# Altium PCB Course Design.PcbDoc
Units mil, origin at the board's own origin, x right, y up, seen from the top; angles counter-clockwise.
Board outline 2739.95 x 2450 mil, 2 copper layers (Top Layer, Bottom Layer); 29 components, 50 nets, 171 pads, 9 vias.
Unrouted connection lines stored in the file: 4.
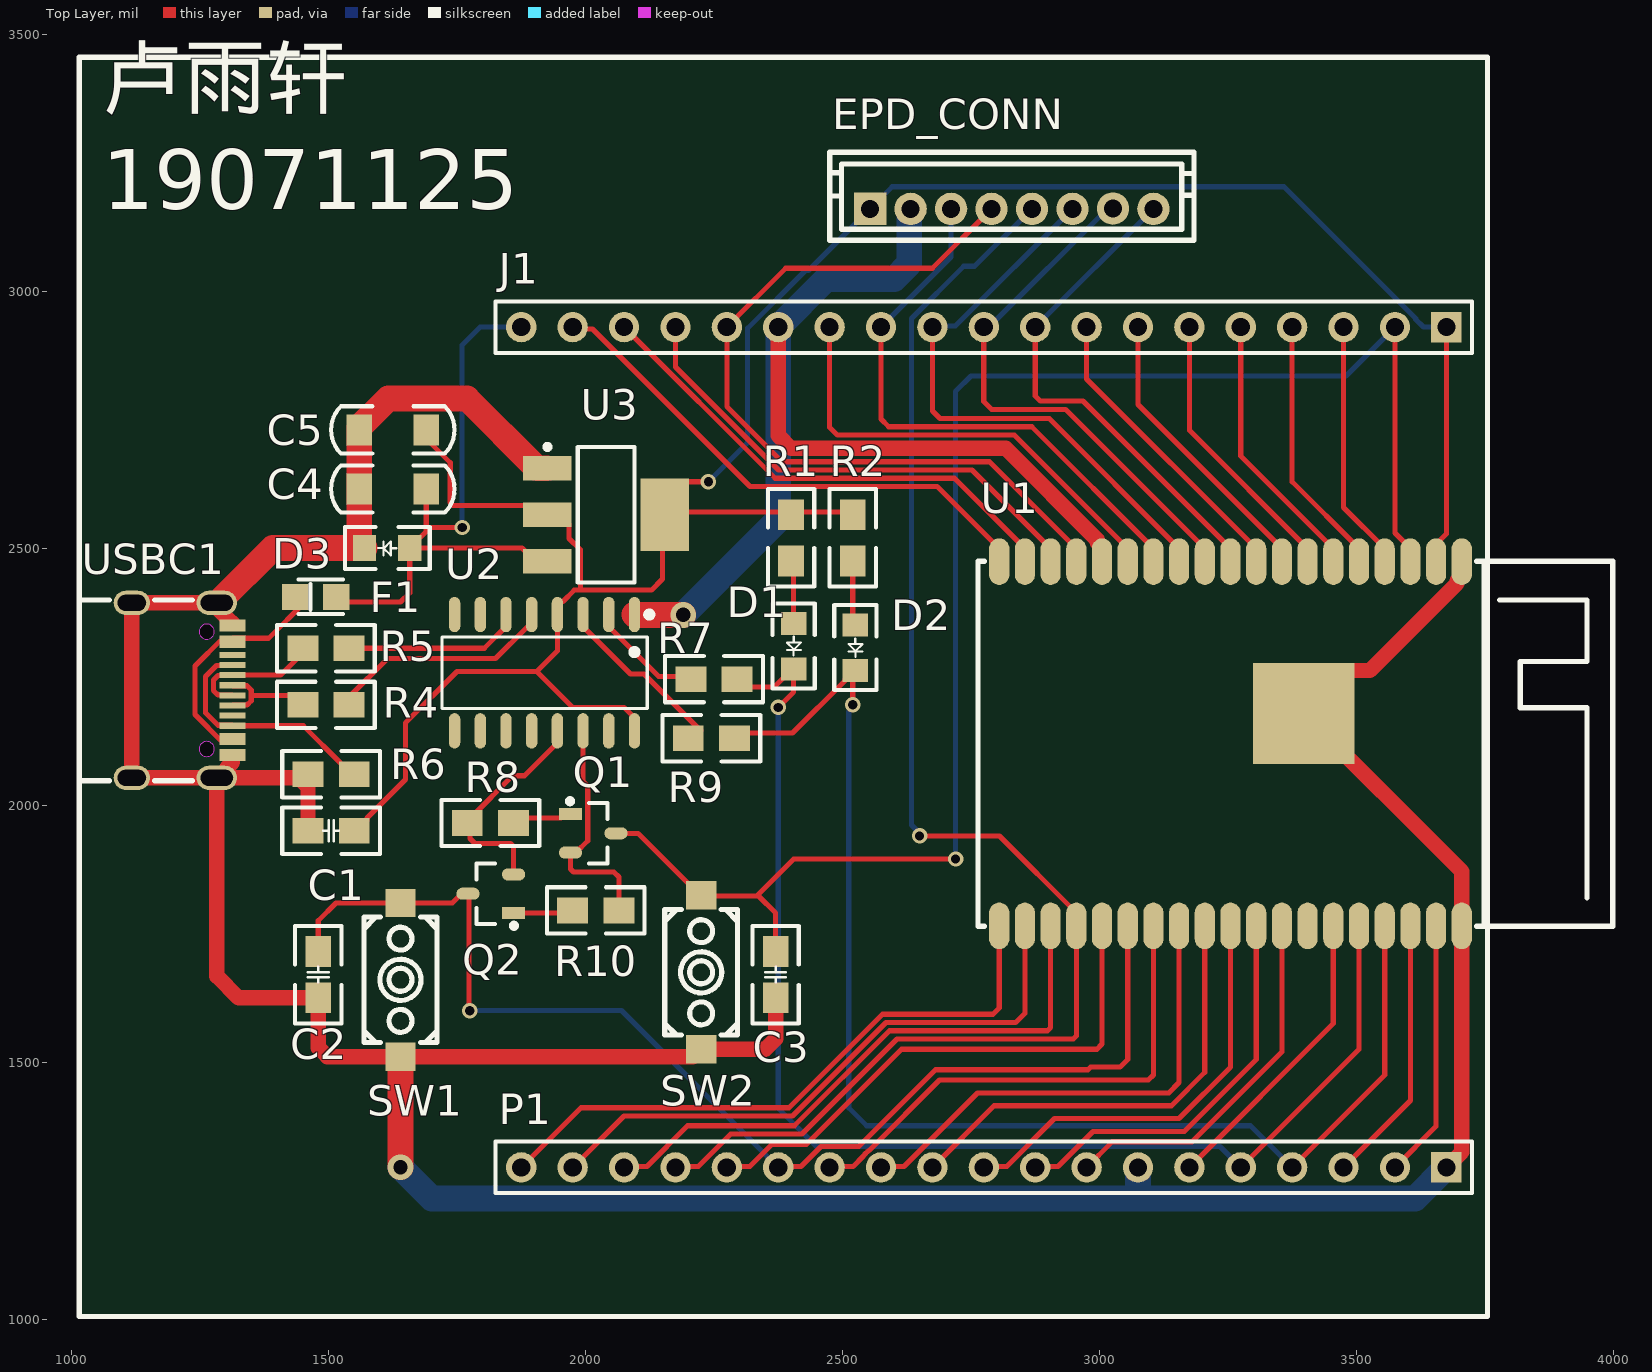
[diagram p0: Top Layer view]
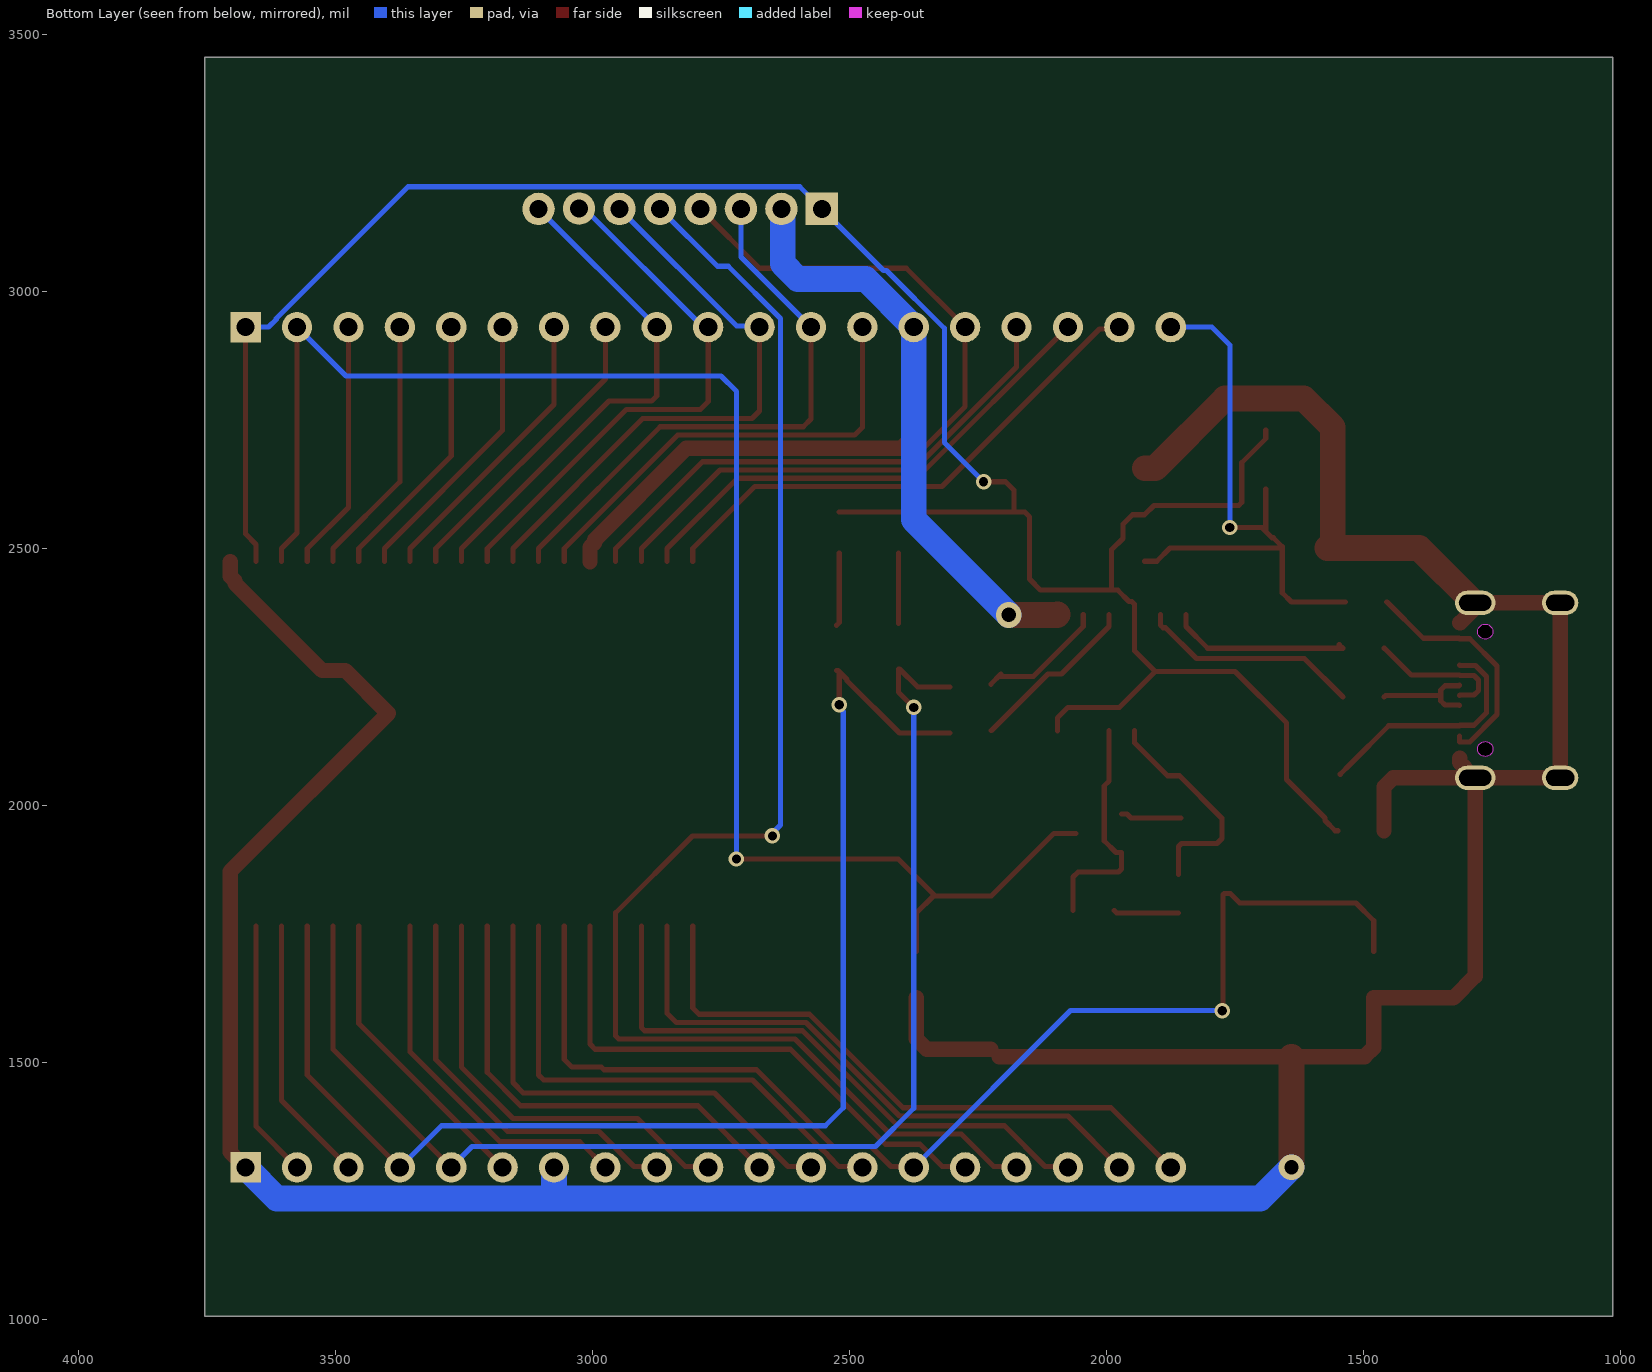
[diagram p1: Bottom Layer view, seen from below]

## Layer stack, top to bottom
Top Solder: solder mask 0.4, Solder Resist, Dk 3.5
Top Layer: signal copper 1.4
Dielectric 1: dielectric 12.6, FR-4, Dk 4.8
Bottom Layer: signal copper 1.4
Bottom Solder: solder mask 0.4, Solder Resist, Dk 3.5

## Board outline
1015.05,1005 1015.05,3455 3755,3455 3755,1005

## Design rules (kind name [scope] priority, off if disabled: settings)
AcuteAngle [All] p1: minimum=9.00000000000000E+0001 checktracksonly=TRUE
Clearance [All] p1: gap=6 ignorepadtopadclearanceinfootprint=FALSE
MinimumSolderMaskSliver [All] p1: minsoldermaskwidth=1
PolygonConnect [All] p1: connectstyle=Relief reliefconductorwidth=10 reliefentries=4 polygonreliefangle="90 Angle" airgapwidth=10
RoutingVias [All] p1: holewidth=28 width=50 viastyle="Through Hole" minholewidth=18 minwidth=30 maxholewidth=28 maxwidth=50
SilkToSolderMaskClearance [IsPad] p1: minsilkscreentomaskgap=6 clearancetoexposedcopper=TRUE
SolderMaskExpansion [All] p1: expansion=4 istentingtop=FALSE
UnRoutedNet [All] p1: checkbadconnections=TRUE
Width [All] p1: maxlimit=100 minlimit=6 preferedwidth=10
27 further rules are at their usual default settings.

## Components (designator, comment, footprint, x,y, rotation, side; value= is the part's Value field where it differs from the comment)
C1 "Cap" 0805C 1550,1950 r180 top value=0.1uF
C2 "Cap" 0805C 1480,1625 r90 top value=0.1uF
C3 "Cap" 0805C 2370,1625 r90 top value=0.1uF
C4 "Cap" 1206C 1560,2615 r0 top value=22uF
C5 "Cap" 1206C 1560,2730 r0 top value=22uF
D1 "RX RED" 0805D 2405,2353 r270 top
D2 "TX GREEN" 0805D 2525,2350 r270 top
D3 "RED LED" 0805D 1658,2500 r180 top
EPD_CONN "X2012WV-08-N0SN" CONN-TH_X2012WV-08-N0SN 2824.1,3160.2 r180 top
F1 "MF PSMF050" 0805 1475,2405 r0 top
J1 "Header 19" HDR1X19 3675,2930 r180 top
P1 "Header 19" HDR1X19 3675,1295 r180 top
Q1 "S8050" SOT23_N 2015,1945 r180 top
Q2 "S8050" SOT23_N 1815.71,1827.6 r0 top
R1 "Res2" 0805R 2400,2475 r90 top value=1K
R2 "Res2" 0805R 2520,2475 r90 top value=1K
R4 "Res2" 0805R 1450,2195 r0 top value=22R
R5 "Res2" 0805R 1450,2305 r0 top value=22R
R6 "Res2" 0805R 1550,2060 r180 top value=5K
R7 "Res2" 0805R 2205,2245 r0 top value=100R
R8 "Res2" 0805R 1770,1965 r0 top value=10K
R9 "Res2" 0805R 2200,2130 r0 top value=100R
R10 "Res2" 0805R 2065,1795 r180 top value=10K
SW1 "K2-1107ST-A4DW-06_C118141" KEY-SMD_L6.2-W3.6-LS8.0 1640,1660 r90 top
SW2 "K2-1107ST-A4DW-06_C118141" KEY-SMD_L6.2-W3.6-LS8.0 2225,1674.6 r90 top
U1 "ESP32-WROVER-B" "ESP32 WROVER B" 3390,2150 r270 top
U2 "CH340C" SOP-16_L10.0 1930,2245 r180 top
U3 "AMS1117-3.3_C2992570" SOT223_N 2040,2565 r0 top
USBC1 "TYPE-C-31-M-12" USB-C_SMD 1165,2230 r270 top

## Footprints (in the part's own frame and the unit in brackets; to place one, negate y for a bottom-side part, rotate by r counter-clockwise, add the part's x,y. Pads: shape width x height; smd on the part's side, far side on the other; paste and mask are expansions set on the pad)
0805 [mil] "Capacitor, SM Tantalum; Body 2.0 x 1.25 mm (LxW typ)"
  rect 52x50 smd: 1(-40,0) 2(40,0)
  silkscreen extent -33,-33 53,33
0805C [mil]
  rect 60x50 smd: 1(0,0) 2(90,0)
  silkscreen extent -50,-45 140,45
0805D [mil]
  rect 45x50 smd: 1(0,0) 2(88,0)
  silkscreen extent -39,-41 126,41
0805R [mil]
  rect 60x50 smd: 1(0,0) 2(90,0)
  silkscreen extent -50,-45 140,45
1206C [mil]
  rect 50x60 smd: 1(0,0) 2(130,0)
  silkscreen extent -55,-46 185,46
CONN-TH_X2012WV-08-N0SN [mil]
  rect 63x63 hole 35.4 mask+1.97: 1(270.3,0.2)
  round 63 hole 35.4 mask+1.97: 2(191.5,0.2) 3(112.8,0.2) 4(34.1,0.2) 5(-44.7,0.2) 6(-123.4,0.2) 7(-202.2,-0.4) 8(-280.9,0.2)
  silkscreen extent -360,-110 349,61
"ESP32 WROVER B" [mil]
  oval 90.6x39.4 smd mask+2: 1(-323.6,315) 2(-323.6,265) 3(-323.6,215) 4(-323.6,165) 5(-323.6,115) 6(-323.6,65) 7(-323.6,15) 8(-323.6,-35) 9(-323.6,-85) 10(-323.6,-135) 11(-323.6,-185) 12(-323.6,-235) 13(-323.6,-285) 14(-323.6,-335) 15(-323.6,-385) 16(-323.6,-435) 17(-323.6,-485) 18(-323.6,-535) 19(-323.6,-585) 20(385,-585) 21(385,-535) 22(385,-485) 23(385,-435) 24(385,-385) 25(385,-335) 26(385,-285) 27(385,-235) 28(385,-185) 29(385,-135) 30(385,-85) 31(385,-35) 32(385,15) 33(385,65) 34(385,115) 35(385,165) 36(385,215) 37(385,265) 38(385,315)
  rect 196.9x196.9 smd mask+2: 39(-28.3,7.5)
  silkscreen extent -324,-626 386,609
HDR1X19 [mm] "Connector; Header; 19 Position"
  rect 1.5x1.5 hole 0.9: 1(0,0)
  round 1.5 hole 0.9: 2(2.54,0) 3(5.08,0) 4(7.62,0) 5(10.16,0) 6(12.7,0) 7(15.24,0) 8(17.78,0) 9(20.32,0) 10(22.86,0) 11(25.4,0) 12(27.94,0) 13(30.48,0) 14(33.02,0) 15(35.56,0) 16(38.1,0) 17(40.64,0) 18(43.18,0) 19(45.72,0)
  silkscreen extent -1.27,-1.27 46.99,1.27
KEY-SMD_L6.2-W3.6-LS8.0 [mm]
  rect 1.4x1.5 smd mask+0.051: 1(-3.8,0) 2(3.8,0)
  silkscreen extent -3.1,-1.8 3.1,1.8
SOP-16_L10.0 [mm]
  oval 0.56x1.745 smd mask+0.051: 1(-4.198,-3.192) 2(-2.928,-3.192) 3(-1.658,-3.192) 4(-0.388,-3.192) 5(0.882,-3.192) 6(2.152,-3.192) 7(3.422,-3.192) 8(4.692,-3.192) 9(4.692,2.553) 10(3.422,2.553) 11(2.152,2.553) 12(0.882,2.553) 13(-0.388,2.553) 14(-1.658,2.553) 15(-2.928,2.553) 16(-4.198,2.553)
  silkscreen extent -5.08,-3.34 5.32,1.45
SOT23_N [mm] "SOT23, 3-Leads, Body 2.9x1.3mm, Pitch 0.95mm, Lead Span 2.3mm - Reverse Pinning, IPC Medium Density"
  rect 1.15x0.6 smd: 1(1.125,-0.95)
  oval 1.15x0.6 smd: 2(1.125,0.95) 3(-1.125,0)
  silkscreen extent -0.7,-1.71 1.27,1.5, body extent -0.7,-1.5 0.7,1.5, height 1.1
SOT223_N [mm] "SOT223, 4-Leads, Body 6.5x3.5mm, Pitch 2.3mm, Lead Span 7mm, IPC Medium Density"
  rect 2.4x1.2 smd: 1(-2.9,2.3) 2(-2.9,0) 3(-2.9,-2.3)
  rect 2.4x3.6 smd: 4(2.9,0)
  silkscreen extent -3.02,-3.35 1.4,3.47, body extent -1.85,-3.35 1.85,3.35, height 1.7
USB-C_SMD [mm]
  oval 1.2x2 hole 0.8 slot 1.6 at 90 deg mask+0.051: 0(-4.153,2.99) 0(4.497,2.99)
  oval 1.2x1.8 hole 0.8 slot 1.4 at 90 deg mask+0.051: 0(-4.153,-1.21) 0(4.497,-1.21)
  rect 0.3x1.3 smd mask+0.051: A1(-3.178,3.758) A4(-2.378,3.758) A5(-1.078,3.758) A6(-0.078,3.758) A7(0.422,3.758) A8(1.422,3.758) A9(2.722,3.758) A12(3.522,3.758) B1(3.222,3.758) B4(2.422,3.758) B5(1.922,3.758) B6(0.922,3.758) B7(-0.578,3.758) B8(-1.578,3.758) B9(-2.078,3.758) B12(-2.878,3.758)
  Keep-Out Layer board cut-out: 3.447,2.49 3.41,2.652 3.306,2.783 3.155,2.855 2.989,2.855 2.838,2.783 2.734,2.652 2.697,2.49 2.697,2.49 2.734,2.327 2.838,2.197 2.989,2.124 3.155,2.124 3.306,2.197 3.41,2.327 3.447,2.49
  Keep-Out Layer board cut-out: -2.353,2.49 -2.39,2.652 -2.494,2.783 -2.644,2.855 -2.811,2.855 -2.962,2.783 -3.066,2.652 -3.103,2.49 -3.103,2.49 -3.066,2.327 -2.962,2.197 -2.811,2.124 -2.644,2.124 -2.494,2.197 -2.39,2.327 -2.353,2.49
  silkscreen extent -4.3,-3.81 4.64,1.77

## Part data
C1 C2 C3 C4 C5: "Capacitor", LatestRevisionDate=17-Jul-2002, LatestRevisionNote="Re-released for DXP Platform.", PackageDescription="Radial Cap, Thru-Hole; 2 Leads; 0.3 in Pin Spacing", PackageReference=RAD-0.3, Published=8-Jun-2000, Publisher="Altium Limited"
D1 D2 D3: library part LED0, "Typical INFRARED GaAs LED", LatestRevisionDate=08-Jul-2005, LatestRevisionNote="Mech Layer 1 removed.", PackageDescription="LED; 2 Leads", PackageReference=LED-0, Published=8-Jun-2000, Publisher="Altium Limited"
EPD_CONN: JLCPCB Part Class="Extended Part", LCSC Part Name="2mm 1x8P", Manufacturer="XKB Connectivity(中国星坤)", Operating Temperature Range=-25℃~+85℃, Welding Temperature (Max)=260℃, Add into BOM=yes, Contact Material=黄铜, Contact Plating=锡, Convert to PCB=yes, Datasheet=https://atta.szlcsc.com/upload/public/pdf/source/20211011/616CF97ACD7EE1DA4493F5FBA6803F08.pdf, Device=X2012WV-08-N0SN, Gender=母型插口, Manufacturer Part=X2012WV-08-N0SN, Mounting Style=-, Name=X2012WV-08-N0SN, Number of PINs Per Row=8, Number of Rows=1, Pins Structure=1x8P, Pitch=2mm, Reference Series=-, Row Spacing=-, Supplier=LCSC, Supplier Footprint=插件,P=2mm, Supplier Part=C571294, Symbol=X2012WV-08-N0SN
F1: library part "Fuse 2", "Fuse", LatestRevisionDate=17-Jul-2002, LatestRevisionNote="Re-released for DXP Platform.", PackageDescription="Thru-Hole; 2 Leads", PackageReference=PIN-W2/E2.8, Published=8-Jun-2000, Publisher="Altium Limited"
J1 P1: "Header, 19-Pin", LatestRevisionDate=17-Jul-2002, LatestRevisionNote="Re-released for DXP Platform.", Publisher="Altium Limited"
Q1 Q2: JLCPCB Part Class="Extended Part", Manufacturer=Doeshare(德芯), Add into BOM=yes, Convert to PCB=yes, Datasheet=https://atta.szlcsc.com/upload/public/pdf/source/20220117/E6D3315E0D6ADDB25840BFFAC039C5C0.pdf, Device=S8050, LCSC Part Name=S8050, Manufacturer Part=S8050, Name=S8050, Supplier=LCSC, Supplier Footprint=SOT-23, Supplier Part=C2931719, Symbol=S8050_C2931719
R1 R2 R4 R5 R6 R7 R8 R9 R10: "Resistor", LatestRevisionDate=17-Jul-2002, LatestRevisionNote="Re-released for DXP Platform.", PackageDescription="Axial Device, Thru-Hole; 2 Leads; 0.4 in Pin Spacing", PackageReference=AXIAL-0.4, Published=8-Jun-2000, Publisher="Altium Limited"
SW1 SW2: Contact Current=50mA, Insulation Resistance=100MΩ, JLCPCB Part Class="Extended Part", LCSC Part Name="轻触开关 3.6*6.1*2.5", Manufacturer=韩国韩荣, Manufacturer Part=K2-1107ST-A4DW-06, Operating Force=250gf@±30gf, Operating Temperature=-25℃~+85℃, Voltage Rating (DC)=12V, Actuator Style=矩形按钮, Add into BOM=yes, Circuit=单刀单掷, Convert to PCB=yes, Datasheet=https://atta.szlcsc.com/upload/public/pdf/source/20210810/381712CEF248770C072B585C3485C888.pdf, Device=K2-1107ST-A4DW-06_C118141, Mechanical Life=100000, Mounting Style=立贴, Name=K2-1107ST-A4DW-06, Supplier=LCSC, Supplier Footprint=SMD, Supplier Part=C118141, Switch Height=2.5mm, Switch Length=6.1mm, Switch Width=3.6mm, Symbol=K2-1107ST-A4SW-06, With Lamp=-
U1: BOM_JLCPCB Part Class="Extended Part", BOM_Manufacturer="Espressif Systems", BOM_Manufacturer Part=ESP32-WROVER-B, BOM_Supplier=LCSC, BOM_Supplier Part=C503591, Contributor=LCSC, spicePre=U, spiceSymbolName=ESP32-WROVER-B
U2: BOM_JLCPCB Part Class="Extended Part", BOM_Manufacturer=WCH, BOM_Manufacturer Part=CH340C, BOM_Supplier=LCSC, BOM_Supplier Part=C84681, spicePre=U, spiceSymbolName=CH340C
U3: JLCPCB Part Class="Extended Part", LCSC Part Name=AMS1117-3.3, Manufacturer=国芯佳品, Add into BOM=yes, Convert to PCB=yes, Datasheet=https://atta.szlcsc.com/upload/public/pdf/source/20220729/0D21C21EC310E4778671BF6BAE438640.pdf, Device=AMS1117-3.3_C2992570, Manufacturer Part=AMS1117-3.3, Name=AMS1117-3.3, Supplier=LCSC, Supplier Footprint=SOT-223, Supplier Part=C2992570, Symbol=AMS1117-3.3_C2992570
USBC1: Current Rating - Power (Max)=250mA, JLCPCB Part Class="Extended Part", Manufacturer=韩国韩荣, Add into BOM=yes, Connector Type=Type-C, Convert to PCB=yes, Datasheet=https://atta.szlcsc.com/upload/public/pdf/source/20210111/C2682493_D8CCFED08835E878D16ACCF4460E43B8.pdf, Device=TYPE-C-31-M-12, Gender=母座, LCSC Part Name=TYPE-C-31-M-12, Manufacturer Part=TYPE-C-31-M-12, Name=TYPE-C-31-M-12, Number of Contacts=16, Number of Ports=1, Standard=-, Supplier=LCSC, Supplier Footprint=-, Supplier Part=C165948, Symbol=TYPE-C-31-M-12

## Via types
v1: diameter 30, hole 18, Top Layer to Bottom Layer, 7 vias
v2: diameter 50, hole 28, Top Layer to Bottom Layer, 2 vias

## Nets (pads, with @x,y where several pads share a name; then routed paths per layer and width w, separated by ;. In a path a pad name is that pad's centre, name@x,y a point inside that pad or via, vN(x,y) a via of type N, cw(c..) or ccw(c..) an arc to the next point about the centre after c; other vN are vias at no path point)
+3.3: C1.1 C5.2 EPD_CONN.1 J1.1 R1.2 R2.2 U1.2 U2.4 U2.16 U3.2 U3.4 | length 4708.8
  Top Layer w10: C1.1 1555,1950 1575,1970 1575,1975 1650,2050 1650,2160 1750,2260 1905,2260 ; C5.2 1690,2712.96 1736.87,2666.09 1736.87,2588.98 1742.73,2583.13 1907.7,2583.13 U3.2 1949.45,2565 1968.07,2546.38 1968.07,2518.63 1990,2496.7 1990,2418.14 ; U2.16 2095.26,2169.74 2075.18,2189.82 1975.18,2189.82 1905,2260 ; v1(2239.12,2629.12) 2196.42,2629.12 2180,2612.7 U3.4@2180,2570 ; R2.2@2520,2570 2405,2570 U3.4@2180,2570 ; U1.2 3655,2507.16 3675,2527.16 J1.1 ; 1905,2260 1945.26,2300.26 1945.26,2390.72 1950.82,2396.28 1956.28,2396.28 1978.14,2418.14 1990,2418.14 ; 1990,2418.14 2128.14,2418.14 2150,2440 2150,2560.83 2159.17,2570 U3.4@2180,2570
  Bottom Layer w10: v1(2239.12,2629.12) 2315.53,2705.53 2315.53,2927.84 2427.83,3040.14 2433.94,3040.14 EPD_CONN.1 2596.9,3203.1 3359.21,3203.1 3615.53,2946.79 3615.53,2944.94 3630.47,2930 J1.1
+5: C4.2 D3.1 F1.2 J1.19 U3.3 | length 1180.9
  Top Layer w10: F1.2@1535,2395 1640,2395 1658,2413 D3.1 ; 1690,2534.5 C4.2 ; v1(1760,2540) 1698,2540 1691.25,2533.25 1678,2520 1675.5,2520 1658,2502.5 D3.1 ; U3.3 1902.2,2474.45 1876.65,2500 D3.1
  Bottom Layer w10: v1(1760,2540) 1760,2895 1795,2930 J1.19
CLK: P1.19 U1.20 | length 1218.4
  Top Layer w10: P1.19 1991,1411 2396,1411 2578,1593 2793,1593 2805,1605 U1.20
CMD: J1.18 U1.19 | length 1034
  Top Layer w10: J1.18 1978.67,2926.33 2013.67,2926.33 2320,2620 2684.2,2620 2805,2499.2 U1.19
D+: R4.1 USBC1.A6 USBC1.B6 | length 213.6
  Top Layer w10: USBC1.B6 1313.86,2194.6 1341.23,2194.6 1349.55,2202.92 1349.55,2213.38 ; USBC1.A6 1313.86,2232.16 1341.24,2232.16 1349.55,2223.85 1349.55,2213.38 ; R4.1@1460,2210 1456.62,2213.38 1349.55,2213.38
D-: R5.1 USBC1.A7 USBC1.B7 | length 270.4
  Top Layer w10: USBC1.A7 1312.05,2214.29 1284.68,2214.29 1276.37,2222.6 1276.37,2243.53 1284.69,2251.85 1312.05,2251.85 USBC1.B7 1406.75,2252.75 1459,2305 R5.1@1460,2305
DTR: Q2.2 R8.1 U2.13 | length 439.8
  Top Layer w10: Q2.2 1860,1919.14 1854.14,1925 1785,1925 1775,1935 1775,1975 1776,1975 1857.92,2056.92 1881.04,2056.92 1945.26,2121.14 U2.13
EN: C3.2 J1.2 Q1.3 SW2.2 U1.3 | length 3151.5
  Top Layer w10: Q1.3 2102.23,1945 2224.02,1823.22 2333.22,1823.22 2334.2,1824.2 ; C3.2 2370,1790 2335.8,1824.2 2334.2,1824.2 ; v1(2720,1895) 2405,1895 2334.2,1824.2 ; J1.2 3575,2529.2 3605,2499.2 U1.3
  Bottom Layer w10: v1(2720,1895) 2720,2805 2750,2835 3480,2835 J1.2
GND: C1.2 C2.1 C3.1 C4.1 C5.1 D3.2 EPD_CONN.2 J1.14 P1.1 P1.7 R6.2 SW1.1 SW2.1 U1.1 U1.15 U1.38 U1.39 U2.1 U3.1 USBC1.0 USBC1.A1 USBC1.A12 USBC1.B1 USBC1.B12 | length 9657.1
  Top Layer w30: USBC1.A12 1312.96,2083.19 1301.76,2071.99 1301.76,2060.91 USBC1.0@1293.79,2052.94 ; USBC1.A1 1311.46,2355.11 1273.07,2393.5 1117.36,2393.5 1117.36,2052.94 USBC1.0@1282.71,2052.94 ; C1.2 1460,2035.37 1442.43,2052.94 USBC1.0@1293.79,2052.94 ; SW2.1@2208.43,1510.4 SW1.1 1497.57,1510.4 1480,1527.97 C2.1 1325,1625 1282.71,1667.29 USBC1.0@1282.71,2052.94 ; SW2.1 2350,1525 2370,1545 C3.1 ; J1.14 2375,2719 2400,2694 2817.76,2694 2995.7,2516.06 2995.7,2511.04 3005,2501.74 U1.15 ; P1.1 3705,1325 U1.38 3705,1870.8 U1.39 3480.95,2261.75 3526.31,2261.75 3695.7,2431.14 3695.7,2436.16 3705,2445.46 U1.1 ; USBC1.0@1282.71,2052.94 USBC1.0@1293.79,2052.94
  Top Layer w50: USBC1.0@1282.71,2393.5 1284.8,2393.5 1391.3,2500 D3.2 1560,2510 C4.1 C5.1 1560,2735 1616,2791 1769.51,2791 1904.96,2655.55 U3.1 ; v2(1640,1295) SW1.1 ; U2.1 2095.91,2370 v2(2190,2370)
  Bottom Layer w50: v2(1640,1295) 1700.53,1234.47 3075,1234.47 ; v2(2190,2370) 2375,2555 J1.14 2468.7,3023.7 2600.82,3023.7 2630.11,3052.99 2630.11,3157.51 EPD_CONN.2 ; P1.7 3075,1234.47 ; P1.1 3614.47,1234.47 3075,1234.47
IO0: C2.2 P1.14 Q2.3 SW1.2 U1.25 | length 2355.6
  Top Layer w10: C2.2 1480,1775 1514.6,1809.6 SW1.2 1740.67,1809.6 1758.67,1827.6 Q2.3 1773.21,1825.81 1773.21,1601.79 v1(1775,1600) ; P1.14 2376.84,1296.84 2419.53,1296.84 2458.21,1335.53 2531.78,1335.53 2681.19,1484.94 2977.57,1484.94 2982.63,1490 3040,1490 3055,1505 U1.25
  Bottom Layer w10: v1(1775,1600) 2070,1600 P1.14
IO2: P1.15 U1.24 | length 1059.4
  Top Layer w10: P1.15 2276.84,1296.84 2319.53,1296.84 2362.69,1340 2430,1340 2615,1525 2995,1525 3005,1535 U1.24
IO4: P1.13 U1.26 | length 994.7
  Top Layer w10: P1.13 2476.84,1296.84 2520.78,1296.84 2541.01,1317.07 cw(c2575,1295) 2552.93,1328.99 2688.94,1465 3095,1465 3105,1475 U1.26
IO5: P1.10 U1.29 | length 835.8
  Top Layer w10: P1.10 2776.84,1296.84 2819.53,1296.84 2912.69,1390 3155,1390 3255,1490 U1.29
IO12: J1.13 U1.14 | length 898.3
  Top Layer w10: J1.13 2475,2735 2490,2720 2834.2,2720 3055,2499.2 U1.14
IO13: EPD_CONN.4 J1.15 U1.16 | length 1585
  Top Layer w10: EPD_CONN.4 2674.62,3044.62 2389.62,3044.62 J1.15 2275,2775.25 2382.25,2668 2786.2,2668 2955,2499.2 U1.16
IO14: EPD_CONN.3 J1.12 U1.13 | length 1125.4
  Top Layer w10: J1.12 2575,2751 2590,2736 2868.2,2736 3105,2499.2 U1.13
  Bottom Layer w10: J1.12 2711.3,3066.3 EPD_CONN.3
IO15: EPD_CONN.5 P1.16 U1.23 | length 2828.5
  Top Layer w10: P1.16 2176.84,1296.84 2219.53,1296.84 2282.69,1360 2421.25,1360 2606.25,1545 2949.14,1545 2955,1550.86 U1.23 2955,1790.6 2805.6,1940 v1(2650,1940)
  Bottom Layer w10: v1(2650,1940) 2650,1945.41 2634.47,1960.94 2634.47,2946.79 2736.01,3048.32 2757.12,3048.32 EPD_CONN.5
IO16: P1.12 U1.27 | length 953.3
  Top Layer w10: P1.12 2576.84,1296.84 2619.53,1296.84 2762.69,1440 3135,1440 3155,1460 U1.27
IO17: P1.11 U1.28 | length 891.6
  Top Layer w10: P1.11 2795,1415 3140,1415 3205,1480 U1.28
IO18: P1.9 U1.30 | length 777
  Top Layer w10: P1.9 2876.84,1296.84 2919.53,1296.84 2987.69,1365 3165,1365 3305,1505 U1.30
IO19: P1.8 U1.31 | length 718.2
  Top Layer w10: P1.8 3025,1345 3180,1345 3355,1520 U1.31
IO21: P1.6 U1.33 | length 586
  Top Layer w10: P1.6 3455,1575 U1.33
IO22: P1.3 U1.36 | length 523.8
  Top Layer w10: P1.3 3605,1425 U1.36
IO23: P1.2 U1.37 | length 503.1
  Top Layer w10: P1.2 3655,1375 U1.37
IO25: EPD_CONN.8 J1.9 U1.10 | length 987.8
  Top Layer w10: J1.9 2875,2796 2885,2786 2968.2,2786 3255,2499.2 U1.10
  Bottom Layer w10: J1.9 EPD_CONN.8
IO26: EPD_CONN.7 J1.10 U1.11 | length 1065.8
  Top Layer w10: J1.10 2775,2785 2790,2770 2934.2,2770 3205,2499.2 U1.11
  Bottom Layer w10: J1.10 2785.35,2930 3015.95,3160.6 EPD_CONN.7
IO27: EPD_CONN.6 J1.11 U1.12 | length 1147.3
  Top Layer w10: J1.11 2675,2767 2690,2752 2902.2,2752 3155,2499.2 U1.12
  Bottom Layer w10: J1.11 2677.03,2932.03 2719.53,2932.03 EPD_CONN.6
IO32: J1.7 U1.8 | length 572.4
  Top Layer w10: J1.7 3075,2779.2 3355,2499.2 U1.8
IO33: J1.8 U1.9 | length 593.1
  Top Layer w10: J1.8 2975,2829.2 3305,2499.2 U1.9
IO34: J1.5 U1.6 | length 531
  Top Layer w10: J1.5 3275,2679.2 3455,2499.2 U1.6
IO35: J1.6 U1.7 | length 551.7
  Top Layer w10: J1.6 3175,2729.2 3405,2499.2 U1.7
NetD1_1: D1.1 R1.1 | length 137
  Top Layer w10: D1.1 R1.1@2405,2490
NetD2_1: D2.1 R2.1 | length 142.1
  Top Layer w10: R2.1@2520,2490 2520,2355 D2.1
NetQ1_1: Q1.1 R8.2 | length 118.8
  Top Layer w10: R8.2@1855,1975 1952.48,1975 1959.88,1982.4 Q1.1
NetQ2_1: Q2.1 R10.2 | length 127
  Top Layer w10: Q2.1 1980.2,1790.2 R10.2@1985,1795
NetR4_2: R4.2 U2.5 | length 433.6
  Top Layer w10: R4.2@1540,2210 1615,2285 1825,2285 1885.02,2345.02 1889.7,2345.02 1895.26,2350.58 U2.5
NetR5_2: R5.2 U2.6 | length 356.1
  Top Layer w10: R5.2@1547.02,2312.02 R5.2 1802.94,2305 1845.26,2347.32 U2.6
NetR6_1: R6.1 USBC1.A5 USBC1.B5 | length 466.7
  Top Layer w10: USBC1.A5 1312.05,2271.53 1281.74,2271.53 1260.37,2250.15 1260.37,2179.56 1284.7,2155.23 1312.05,2155.23 USBC1.B5 1450.68,2154.32 1525,2080 R6.1@1545.11,2059.89
RTS: Q1.2 R10.1 U2.14 | length 458.5
  Top Layer w10: U2.14 1995.26,2046.5 2004.35,2037.42 2004.35,1930.41 1981.53,1907.6 Q1.2 1970.71,1875.86 1976.57,1870 2055,1870 2065,1860 R10.1
RXD: R9.1 U2.3 | length 336.9
  Top Layer w10: U2.3 1995.26,2347.32 2087.57,2255.01 2113.99,2255.01 2224,2145 R9.1@2225,2145
RXD0: D1.2 P1.5 R7.2 U1.34 | length 2494.8
  Top Layer w10: R7.2@2305,2230 2367.5,2230 2402.5,2265 D1.2 2405,2220 v1(2375,2190) ; P1.5 3505,1525 U1.34
  Bottom Layer w10: v1(2375,2190) 2375,1410 2449.47,1335.53 3234.47,1335.53 P1.5
SD0: P1.18 U1.21 | length 1174.3
  Top Layer w10: P1.18 2075,1395 2402.63,1395 2584.63,1577 2837,1577 2855,1595 U1.21
SD1: P1.17 U1.22 | length 1140.7
  Top Layer w10: P1.17 2076.84,1296.84 2119.53,1296.84 2198.69,1376 2406.25,1376 2591.25,1561 2899.14,1561 2905,1566.86 U1.22
SD2: J1.16 U1.17 | length 979.4
  Top Layer w10: J1.16 2175,2852.63 2375.63,2652 2752.2,2652 2905,2499.2 U1.17
SD3: J1.17 U1.18 | length 984
  Top Layer w10: J1.17 2369,2636 2718.2,2636 2855,2499.2 U1.18
SENSOR_VN: J1.4 U1.5 | length 510.2
  Top Layer w10: J1.4 3375,2629.2 3505,2499.2 U1.5
SENSOR_VP: J1.3 U1.4 | length 489.5
  Top Layer w10: J1.3 3475,2579.2 3555,2499.2 U1.4
TXD: R7.1 U2.2 | length 251.7
  Top Layer w10: U2.2 2045.26,2347.32 2142.58,2250 R7.1@2205,2250 ; R7.1@2205,2255 R7.1@2225,2235
TXD0: D2.2 P1.4 R9.2 U1.35 | length 2582.7
  Top Layer w10: R9.2@2305,2140 2403,2140 2505,2242 2505,2244.5 D2.2@2522.5,2262 ; v1(2520,2195) 2520,2259.5 D2.2@2522.5,2262 ; D2.2 D2.2@2522.5,2262 ; P1.4 3555,1475 U1.35
  Bottom Layer w10: v1(2520,2195) 2520,2189.59 2512.19,2181.78 2512.19,1410.94 2547.19,1375.94 3294.06,1375.94 P1.4
VBUS: F1.1 USBC1.A4 USBC1.A9 USBC1.B4 USBC1.B9 | length 467.7
  Top Layer w10: USBC1.B4 USBC1.A9 1293.27,2122.82 1240,2176.1 1240,2270.34 1293.27,2323.61 USBC1.A4 1313.86,2324.52 1383.52,2324.52 1454,2395 F1.1@1455,2395
pads on no net: U1.32 U2.7 U2.8 U2.9 U2.10 U2.11 U2.12 U2.15 USBC1.A8 USBC1.B8

## Silkscreen, mask and mechanical layers (free items; w line width, h text height)
Top Overlay:
  the board outline again, w10
  text "卢雨轩 / 19071125" at 1060,3120 h200

## Dimensions
1015.05,1005 to 3755,1005 on Top Overlay
3755,1005 to 3755,3455 on Top Overlay